# Allegro board CarteV2.brd
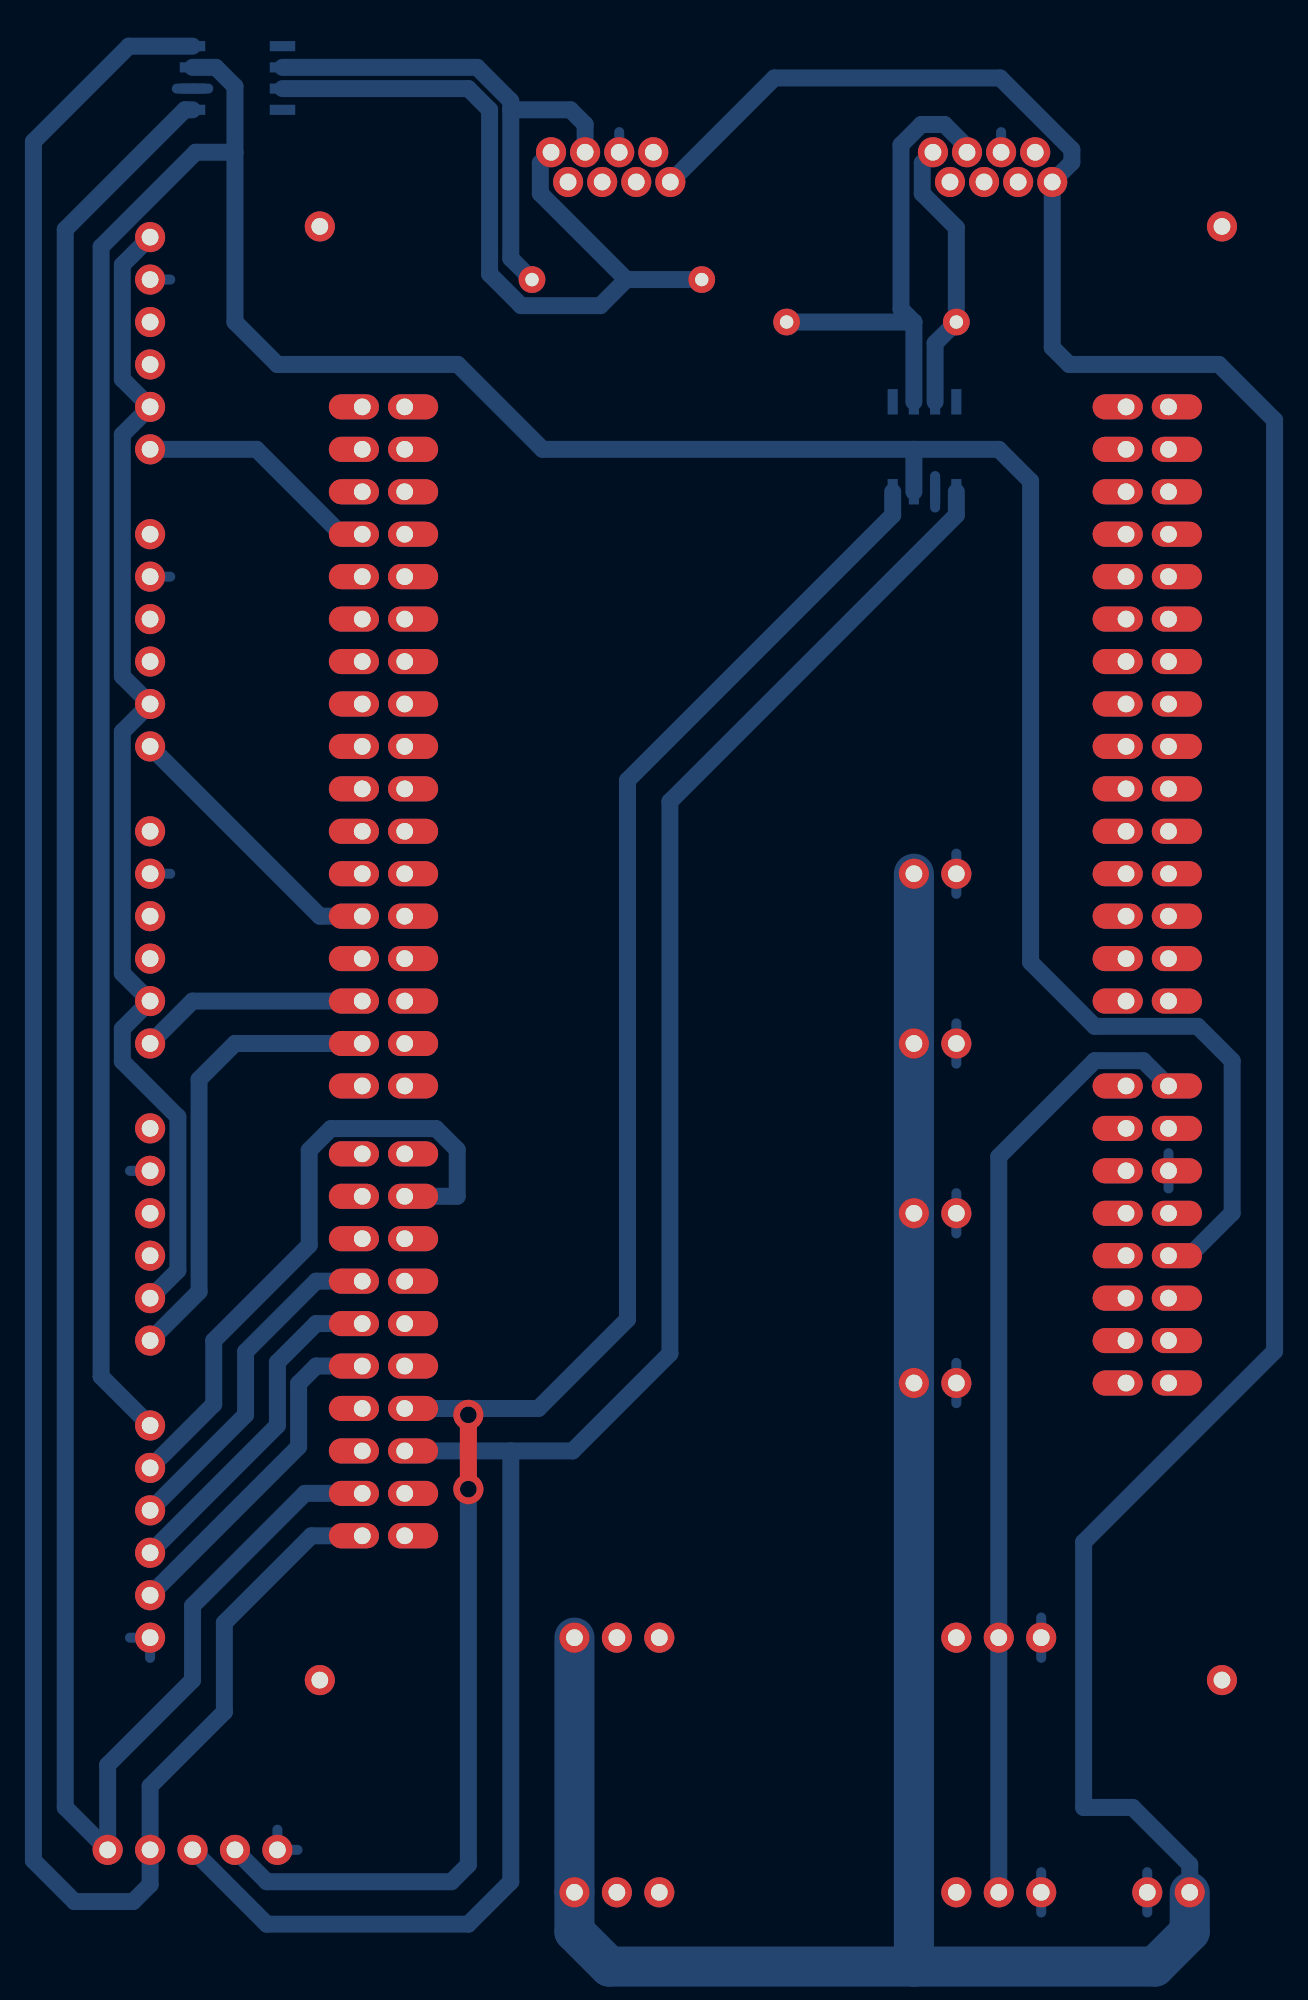
[diagram p0: board, top side]
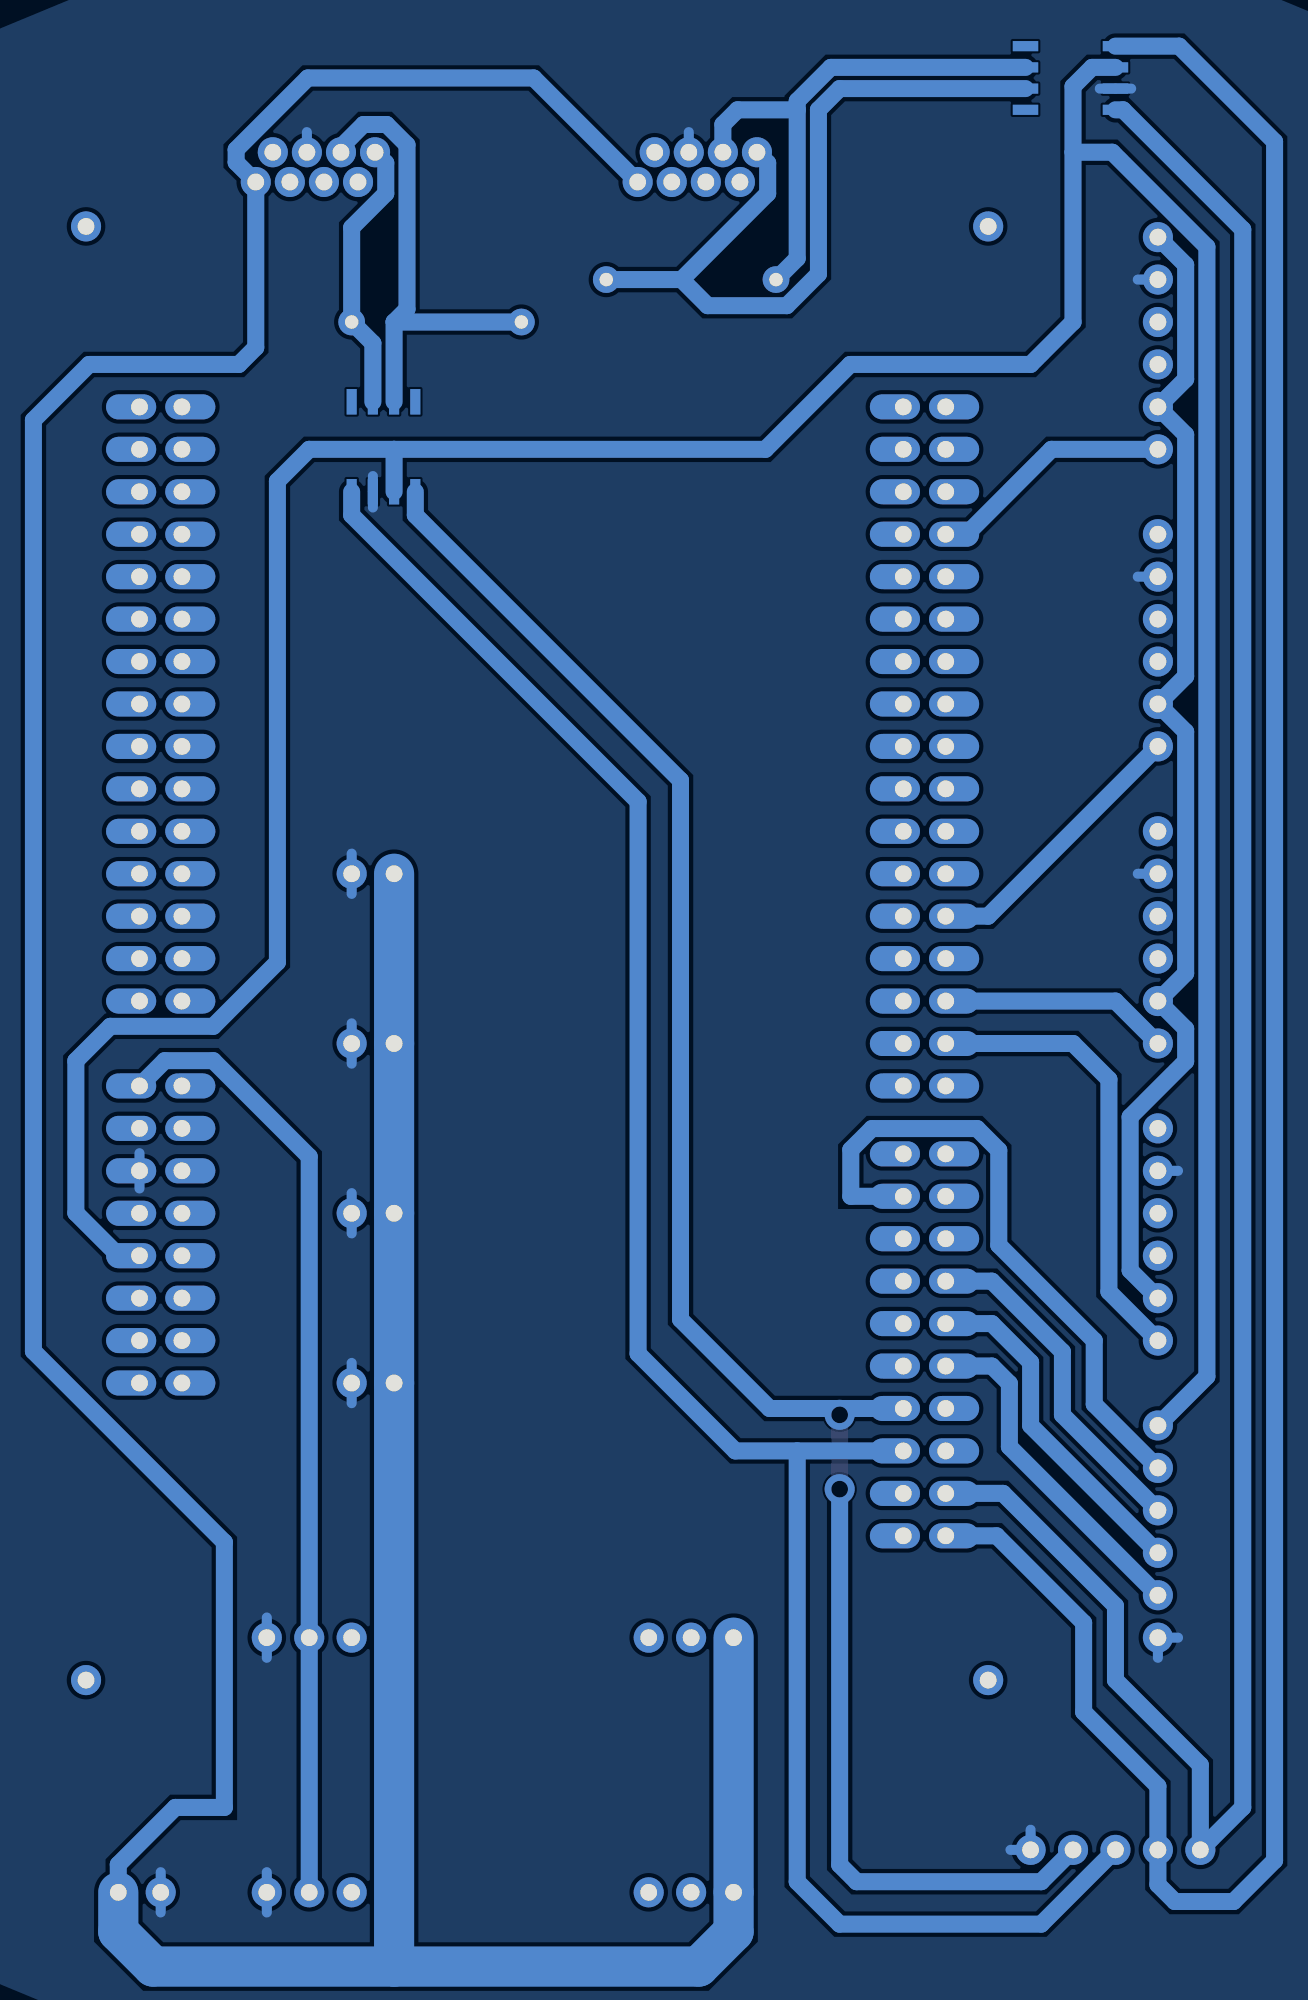
[diagram p1: board, bottom side, seen from below]

No outline. copper layers: TOP, BOTTOM. Coordinates in mm from the lowest, leftmost part position.

## Design rules (mm)
constraint set DEFAULT: min track width 1.016

## Placement (name value [footprint] x y rotation side)
J11  Sortie_1  [CONNECTEUR_2]  77.47 0 180 top
J12  Sortie_2  [CONNECTEUR_2]  45.72 30.48 0 top
J13  Sortie_3  [CONNECTEUR_2]  45.72 40.64 0 top
J14  Sortie_4  [CONNECTEUR_2]  45.72 60.96 0 top
J15  Entree_24V  [CONNECTEUR_2]  45.72 50.8 0 top
J17  Nappe_1  [CONNECTEUR_6]  7.62 27.94 90 top
J18  Nappe_2  [CONNECTEUR_6]  7.62 45.72 90 top
J19  Nappe_3  [CONNECTEUR_6]  7.62 63.5 90 top
J20  Nappe_4  [CONNECTEUR_6]  7.62 81.28 90 top
J23  Lect_Interm_RxTx  [CONNECTEUR_5]  20.32 2.54 180 top
J24  Potar  [CONNECTEUR_6]  7.62 10.16 90 top
R3  120  [RES_01]  30.48 96.52 0 top
R4  120  [RES_01]  45.72 93.98 0 top
U5  sn69hvd232d  [SN65HVD232D]  10.16 106.68 0 bottom
U6  sn69hvd232d  [SN65HVD232D]  55.88 83.82 90 bottom
U7  nucleo_144_shield  [NUCLEO_144_SHIELD]  68.58 88.9 180 top
U8  Conv_TEL_3-2411  [CONV_TRACO]  40.64 30.48 90 top
U9  RJ-45  [RJ45]  0 104.14 0 top
U10  RJ-45  [RJ45]  22.86 104.14 0 top
U11  Trou_Drivers  [TROU_DRIVERS]  17.78 12.7 90 top

## Library data of the parts
J11-J15 = CON2
J17-J20 J24 = CON6
J23 = CON5
R3 R4 = R
U5 U6 = sn69hvd232d
U7 = nucleo_144_shield
U8 = Conv_TEL_3-2411
U9 U10 = RJ-45
U11 = Trou_Drivers

## Footprints (pads in the part's own frame, mm; a bottom-side part is the same pattern mirrored in y, then rotated)
CONNECTEUR_2
  round 1.8 hole 1: 1(7.62,0) 2(10.16,0)
CONNECTEUR_5
  round 1.8 hole 1: 1(5.08,0) 2(7.62,0) 3(10.16,0) 4(12.7,0) 5(15.24,0)
CONNECTEUR_6
  round 1.8 hole 1: 1(5.08,0) 2(7.62,0) 3(10.16,0) 4(12.7,0) 5(15.24,0) 6(17.78,0)
CONV_TRACO
  round 1.8 hole 1: 1(-30.48,7.62) 2(-30.48,5.08) 3(-30.48,2.54) 4(-15.24,7.62) 5(-15.24,5.08) 6(-15.24,2.54) 7(-30.48,-15.24) 8(-30.48,-17.78) 9(-30.48,-20.32) 10(-15.24,-15.24) 11(-15.24,-17.78) 12(-15.24,-20.32)
NUCLEO_144_SHIELD
  oval 3x1.5 hole 1: 1(0,58.42) 2(2.54,58.42) 3(0,55.88) 4(2.54,55.88) 5(0,53.34) 6(2.54,53.34) 7(0,50.8) 8(2.54,50.8) 9(0,48.26) 10(2.54,48.26) 11(0,45.72) 12(2.54,45.72) 13(0,43.18) 14(2.54,43.18) 15(0,40.64) 16(2.54,40.64) 17(0,35.56) 18(2.54,35.56) 19(0,33.02) 20(2.54,33.02) 21(0,30.48) 22(2.54,30.48) 23(0,27.94) 24(2.54,27.94) 25(0,25.4) 26(2.54,25.4) 27(0,22.86) 28(2.54,22.86) 29(0,20.32) 30(2.54,20.32) 31(0,17.78) 32(2.54,17.78) 33(0,15.24) 34(2.54,15.24) 35(0,12.7) 36(2.54,12.7) 37(0,10.16) 38(2.54,10.16) 39(0,7.62) 40(2.54,7.62) 41(0,5.08) 42(2.54,5.08) 43(0,2.54) 44(2.54,2.54) 45(0,0) 46(2.54,0) 47(45.72,67.564) 48(48.26,67.564) 49(45.72,65.024) 50(48.26,65.024) 51(45.72,62.484) 52(48.26,62.484) 53(45.72,59.944) 54(48.26,59.944) 55(45.72,57.404) 56(48.26,57.404) 57(45.72,54.864) 58(48.26,54.864) 59(45.72,52.324) 60(48.26,52.324) 61(45.72,49.784) 62(48.26,49.784) 63(45.72,47.244) 64(48.26,47.244) 65(45.72,44.704) 66(48.26,44.704) 67(45.72,40.64) 68(48.26,40.64) 69(45.72,38.1) 70(48.26,38.1) 71(45.72,35.56) 72(48.26,35.56) 73(45.72,33.02) 74(48.26,33.02) 75(45.72,30.48) 76(48.26,30.48) 77(45.72,27.94) 78(48.26,27.94) 79(45.72,25.4) 80(48.26,25.4) 81(45.72,22.86) 82(48.26,22.86) 83(45.72,20.32) 84(48.26,20.32) 85(45.72,17.78) 86(48.26,17.78) 87(45.72,15.24) 88(48.26,15.24) 89(45.72,12.7) 90(48.26,12.7) 91(45.72,10.16) 92(48.26,10.16) 93(45.72,7.62) 94(48.26,7.62) 95(45.72,5.08) 96(48.26,5.08) 97(45.72,2.54) 98(48.26,2.54) 99(45.72,0) 100(48.26,0)
RES_01
  round 1.6 hole 0.8: 1(0,0) 2(10.16,0)
RJ45
  round 1.8 hole 1: 1(31.62,0) 2(33.66,0) 3(35.7,0) 4(37.74,0) 5(32.64,-1.78) 6(34.68,-1.78) 7(36.72,-1.78) 8(38.76,-1.78)
SN65HVD232D
  rect 1.524x0.61 smd: 1(0,0) 2(0,-1.27) 3(0,-2.54) 4(0,-3.81) 5(5.385,-3.81) 6(5.385,-2.54) 7(5.385,-1.27) 8(5.385,0)
TROU_DRIVERS
  round 1.8 hole 1: 1(0,0) 2(87,0) 3(0,-54) 4(87,-54)

## Nets
24V_ALIM: J11.1 J12.1 J13.1 J14.1 J15.1 U8.1 U8.4 U9.8(PIN_8) U10.8(PIN_8)
+3V3: J24.6 U5.3(VCC) U6.3(VCC) U7.7
+5V: U7.9
VIN_5V: U7.15 U8.8 U8.11
0: J11.2 J12.2 J13.2 J14.2 J15.2 J17.5 J18.5 J19.5 J20.5 J23.1 J24.1 U5.2 U6.2 U7.11 U8.9 U8.12 U9.3 U10.3
CAN1_H: R3.2 U5.7 U9.1
CAN1_L: R3.1 U5.6 U9.2
CAN1RX_PB8: J23.4 U5.4 U7.48
CAN1TX_PB9: J23.5 U5.1 U7.50
CAN2_H: R4.2 U6.7 U10.1
CAN2_L: R4.1 U6.6 U10.2
CAN2RX_PB12: J23.2 U6.4 U7.53
CAN2TX_PB13: J23.3 U6.1 U7.51
CH1_PE9: J17.1 U7.70(PE9)
CH2_PE11: J18.1 U7.72
CH3_PE13: J19.1 U7.76
CH4_PE14: J20.1 U7.94
PA4: J24.5 U7.63
PA5: J24.2 U7.56
PA6: J24.3 U7.58
PA7: J24.4 U7.60
N37105: J17.2 J18.2 J19.2 J20.2 J20.6

Pads without a net: J17 3 4 6; J18 3 4 6; J19 3 4 6; J20 3 4; U5 5 8; U6 5 8; U7 1 2 3 4 5 6 8 10 12 13 14 16 17 18 19 20 21 22 23 24 25 26 27 28 29 30 31 32 33 34 35 36 37 38 39 40 41 42 43 44 45 46 47 49 52 54 55 57 59 61 62 64 65 66 67 68 69 71 73 74 75 77 78 79 80 81 82 83 84 85 86 87 88 89 90 91 92 93 95 96 97 98 99 100; U8 2 3 5 6 7 10; U9 4 5 6 7; U10 4 5 6 7; U11 1 2 3 4

## Via types
v1: diameter 1.8, hole 1, TOP to BOTTOM, 2 vias

## Routing (per net, layer and track width the routed paths; a pad name or vN(x,y) marks a point on that pad's centre or on a via; arc(x,y) is an arc through that point)
24V_ALIM: length 276.9
  BOTTOM w1.016: J11.1 69.85,1.66 66.43,5.08 63.5,5.08 63.5,20.96 74.93,32.39 74.93,88.11 71.6,91.44 62.64,91.44 61.62,92.46 U10.8 62.8,103.54 62.8,104.3 58.51,108.58 44.98,108.58 38.76,102.36
  BOTTOM w2.4: 53.34,-4.45 67.76,-4.45 69.85,-2.35 J11.1 ; 53.34,-4.45 35.11,-4.45 33.02,-2.35 33.02,15.24 ; 53.34,-4.45 J12.1 J13.1 J15.1 J14.1
+3V3: length 210.6
  BOTTOM w1.016: 68.58,38.1 69.83,38.1 72.39,40.66 72.39,49.76 70.33,51.83 64.16,51.83 60.33,55.67 60.33,84.45 58.42,86.36 53.34,86.36 ; U5.3 11.56,109.22 12.7,108.08 12.7,104.14 ; 53.34,86.36 31.11,86.36 26.03,91.44 15.24,91.44 12.7,93.98 12.7,104.14 ; 53.34,86.36 U6.3 ; 12.7,104.14 10.35,104.14 4.69,98.48 4.69,30.87 J24.6
VIN_5V: length 57.2
  BOTTOM w1.016: 68.58,48.26 67.07,49.77 64.16,49.77 58.42,44.03 58.42,0
0: length 34.8
  BOTTOM w0.6: 54.61,84.76 U6.2 54.61,82.88 ; 9.22,107.95 U5.2 11.1,107.95 ; U9.3 35.7,105.35 ; 60.96,-1.21 60.96,1.21 ; 15.24,3.75 J23.1 16.45,2.54 ; J19.5 8.83,78.74 ; 55.88,49.59 J15.2 55.88,52.01 ; 60.96,16.45 60.96,14.03 ; 7.62,14.03 7.62,15.24 6.41,15.24 ; 68.58,42.12 68.58,44.24 ; 67.31,-1.21 J11.2 67.31,1.21 ; J18.5 8.83,60.96 ; 55.88,31.69 J12.2 55.88,29.27 ; U10.3 58.56,105.35 ; 6.41,43.18 J17.5 ; 55.88,62.17 J14.2 55.88,59.75 ; J20.5 8.83,96.52 ; 55.88,41.85 J13.2 55.88,39.43
CAN1_H: length 46.9
  BOTTOM w1.016: U9.1 30.98,103.5 30.98,101.67 36.13,96.52 ; 36.13,96.52 34.57,94.96 29.83,94.96 27.94,96.85 27.94,106.68 26.67,107.95 U5.7 ; 36.13,96.52 R3.2
CAN1_L: length 32.2
  BOTTOM w1.016: U5.6 27.2,109.22 29.21,107.21 29.21,106.68 ; U9.2 33.66,105.8 32.78,106.68 29.21,106.68 ; 29.21,106.68 29.21,97.79 R3.1
CAN1RX_PB8: length 151.1
  BOTTOM w1.016: 20.32,21.34 17.27,21.34 12.07,16.13 12.07,10.8 7.62,6.35 J23.4 7.62,0.46 6.6,-0.55 3.09,-0.55 0.63,1.9 0.63,104.77 6.35,110.49 U5.4
CAN1TX_PB9: length 138.3
  BOTTOM w1.016: U5.1 9.7,106.68 2.54,99.52 2.54,5.08 J23.5 5.08,7.62 10.16,12.7 10.16,17.15 16.89,23.88 20.32,23.88
CAN2_H: length 16.6
  BOTTOM w1.016: U6.7 54.61,92.71 R4.2 55.88,99.63 53.84,101.67 53.84,103.5 U10.1
CAN2_L: length 28.6
  BOTTOM w1.016: 53.34,93.98 52.57,94.75 52.57,104.58 53.79,105.8 55.17,105.8 56.52,104.45 U10.2 ; 53.34,93.98 U6.6 ; 53.34,93.98 R4.1
CAN2RX_PB12: length 114.3
  TOP w1.016: v1(26.67,24.13) v1(26.67,28.57)
  BOTTOM w1.016: 26.29,28.96 v1(26.67,28.57) ; 26.29,28.96 22.86,28.96 ; 26.29,28.96 30.86,28.96 36.19,34.29 36.19,66.55 52.07,82.42 U6.4 ; J23.2 14.61,0.63 25.65,0.63 26.67,1.65 v1(26.67,24.13)
CAN2TX_PB13: length 124.7
  BOTTOM w1.016: 29.21,26.42 32.91,26.42 38.73,32.24 38.73,65.28 55.88,82.42 U6.1 ; 29.21,26.42 29.21,0.63 26.67,-1.9 14.61,-1.9 J23.3 ; 29.21,26.42 22.86,26.42
CH1_PE9: length 27.5
  BOTTOM w1.016: J17.1 10.55,35.95 10.55,48.65 12.7,50.8 20.32,50.8
CH2_PE11: length 13.8
  BOTTOM w1.016: 20.32,53.34 10.16,53.34 J18.1
CH3_PE13: length 16.9
  BOTTOM w1.016: J19.1 17.78,58.42 20.32,58.42
CH4_PE14: length 14.8
  BOTTOM w1.016: J20.1 13.99,86.36 19.07,81.28 20.32,81.28
PA4: length 38.8
  BOTTOM w1.016: J24.5 11.43,29.21 11.43,33.02 17.14,38.73 17.14,44.41 18.44,45.71 24.74,45.71 26,44.44 26,41.66 22.86,41.66
PA5: length 20.6
  BOTTOM w1.016: J24.2 16.51,26.67 16.51,30.45 17.56,31.5 20.32,31.5
PA6: length 20.6
  BOTTOM w1.016: 20.32,34.04 17.56,34.04 15.24,31.72 15.24,27.94 J24.3
PA7: length 20.6
  BOTTOM w1.016: 20.32,36.58 17.56,36.58 13.34,32.35 13.34,28.57 J24.4
N37105: length 70.4
  BOTTOM w1.016: J20.6 5.96,97.4 5.96,90.56 J20.2 5.96,87.24 5.96,72.78 J19.2 5.96,69.46 5.96,55 J18.2 5.96,51.68 5.96,49.73 9.28,46.41 9.28,37.22 J17.2

## Copper pours and planes (outline as drawn; the poured copper is in the pictures)
0 on BOTTOM: -5.71,109.94 -5.71,-3.89 -4.25,-5.35 4.29,-8.89 68.74,-8.89 77.28,-5.35 78.74,-3.89 78.74,109.94 77.28,111.4 68.74,114.94 4.29,114.94 -4.25,111.4
